# Altium PCB LTE_GPS_433_V1.0.PcbDoc (part 1 of 2)
Units mil, origin at the board's own origin, x right, y up, seen from the top; angles counter-clockwise.
Board outline 3937.01 x 2362.2 mil, 4 copper layers (Top Layer, Mid-Layer 2, POWER, Bottom Layer); 243 components, 180 nets, 856 pads, 468 vias.
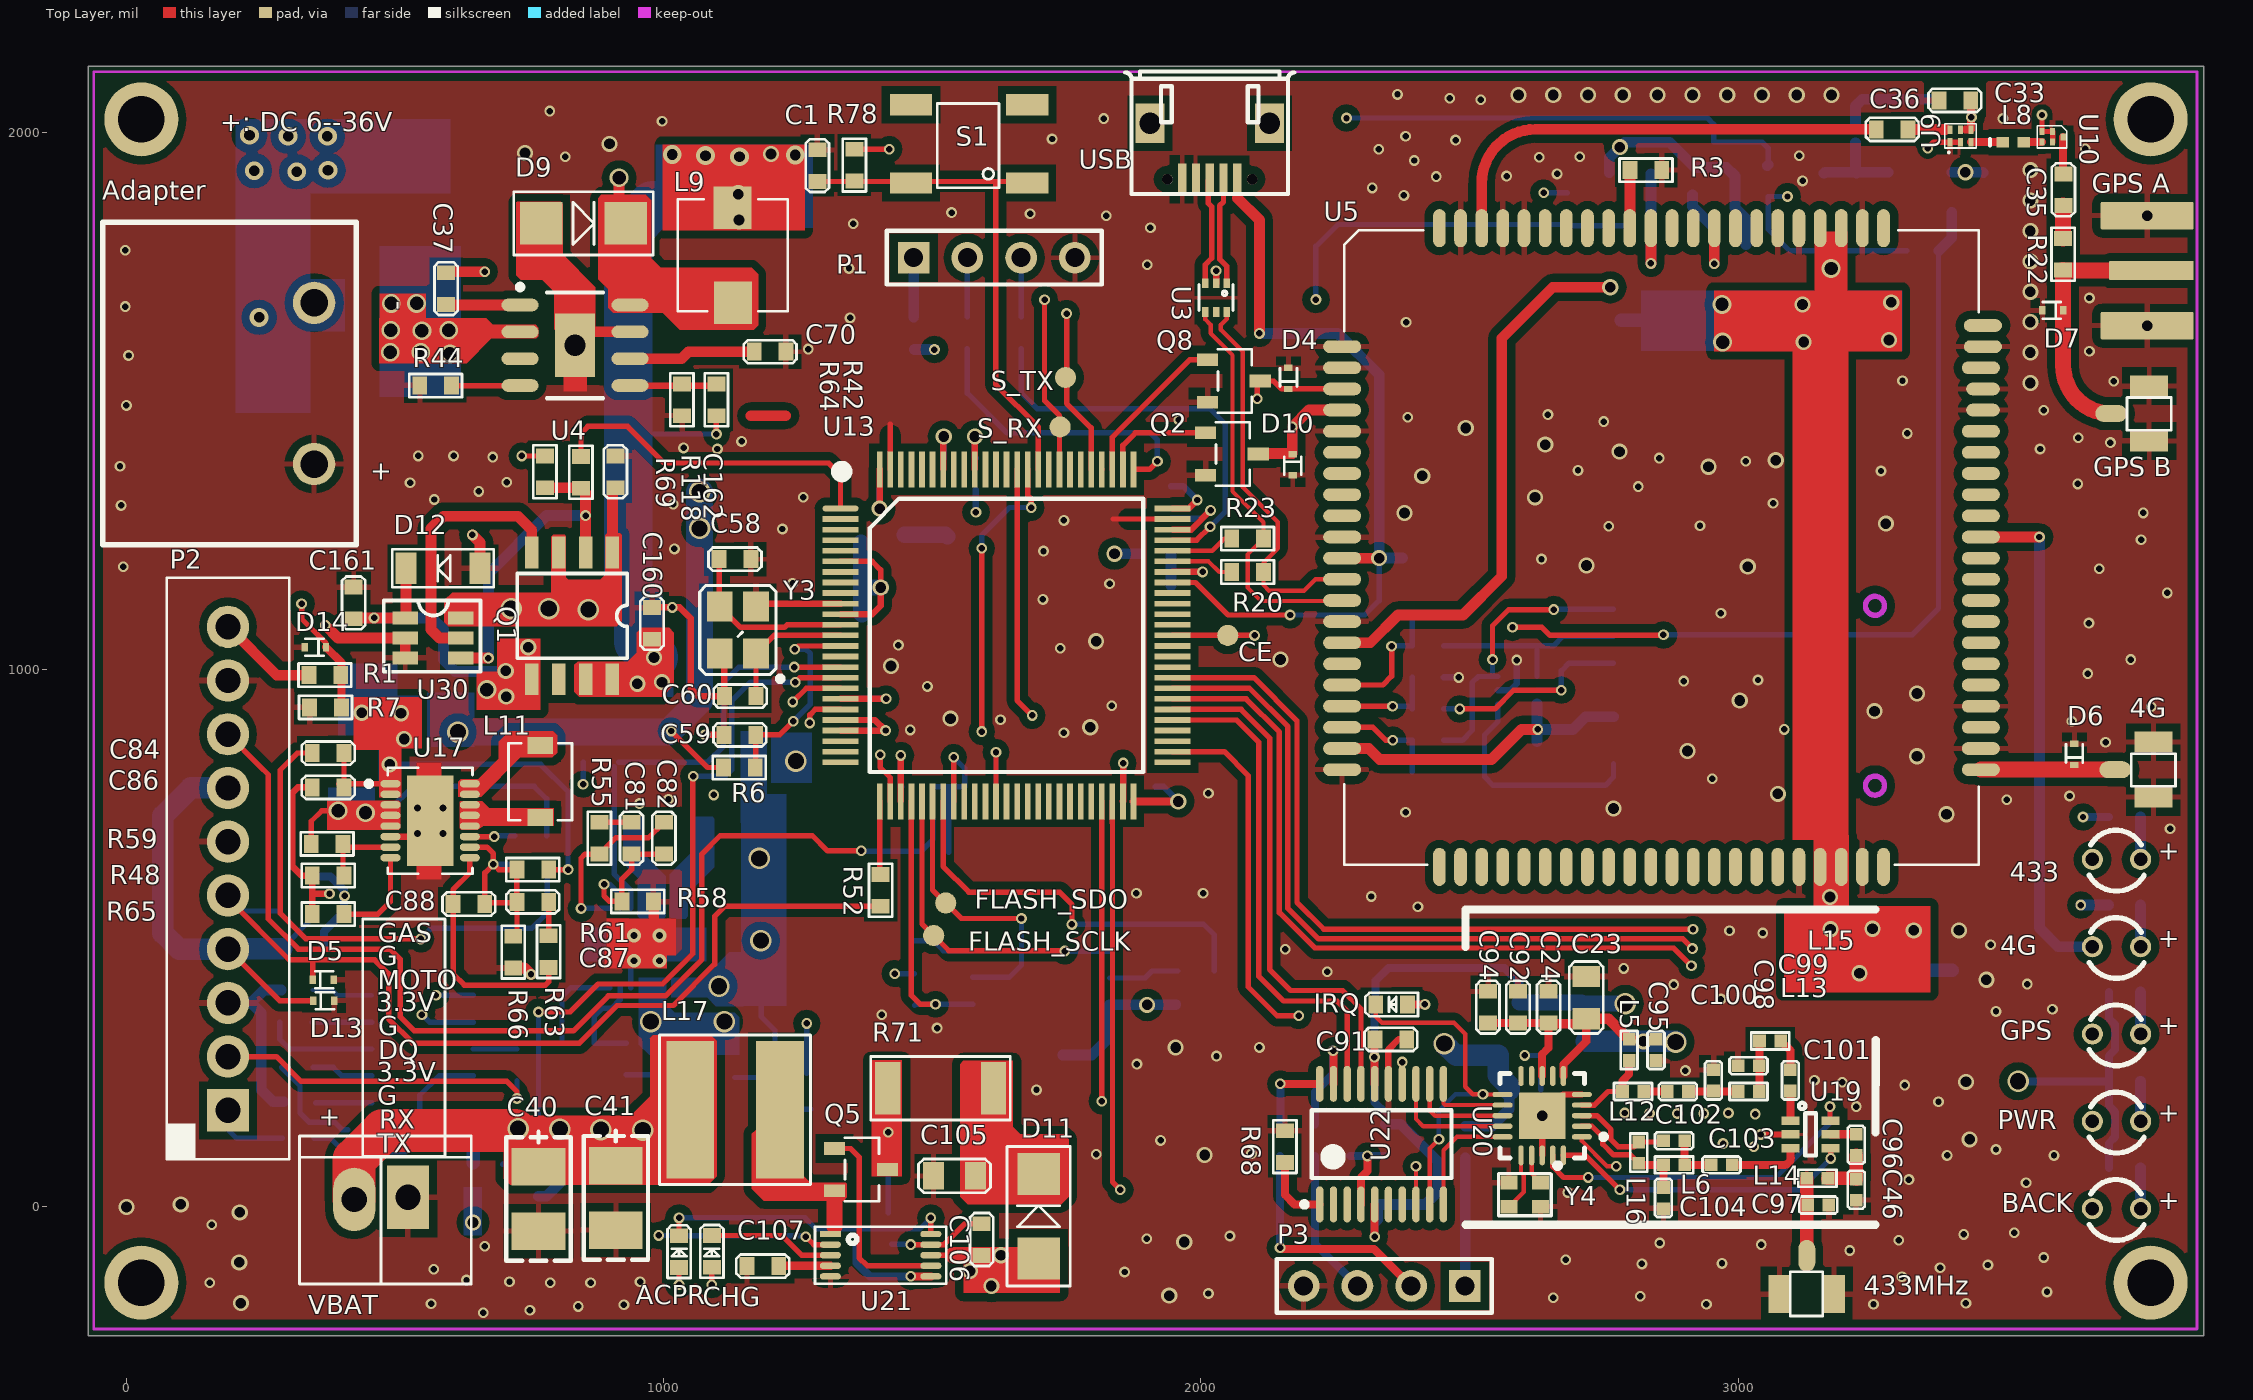
[diagram p0: Top Layer view]
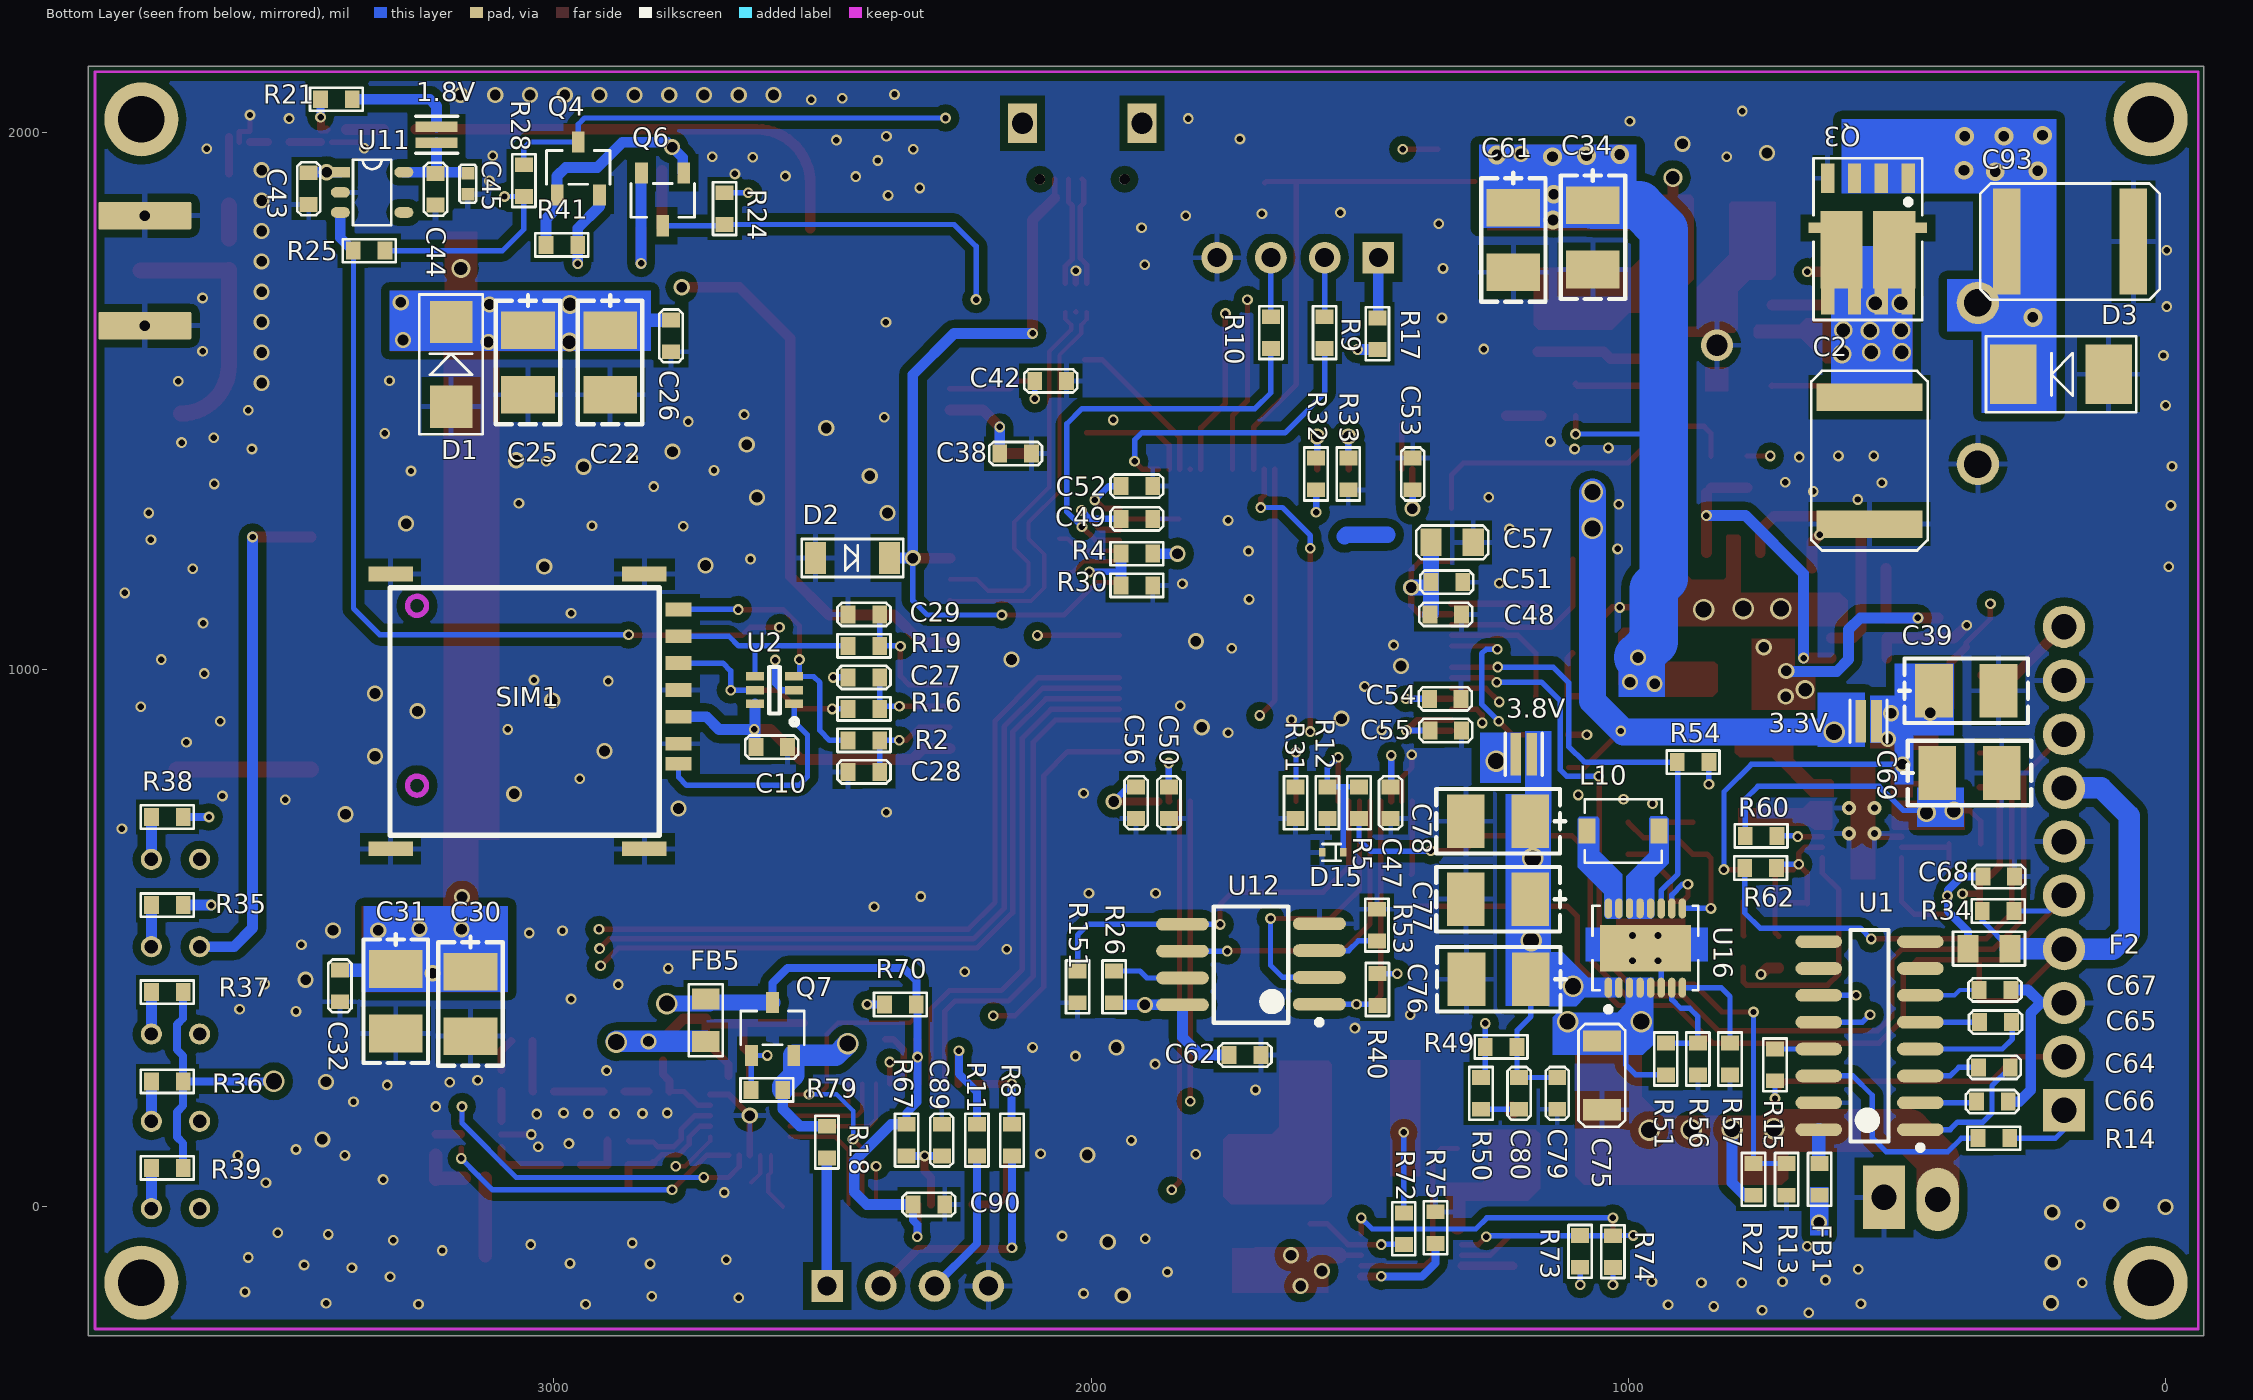
[diagram p1: Bottom Layer view, seen from below]
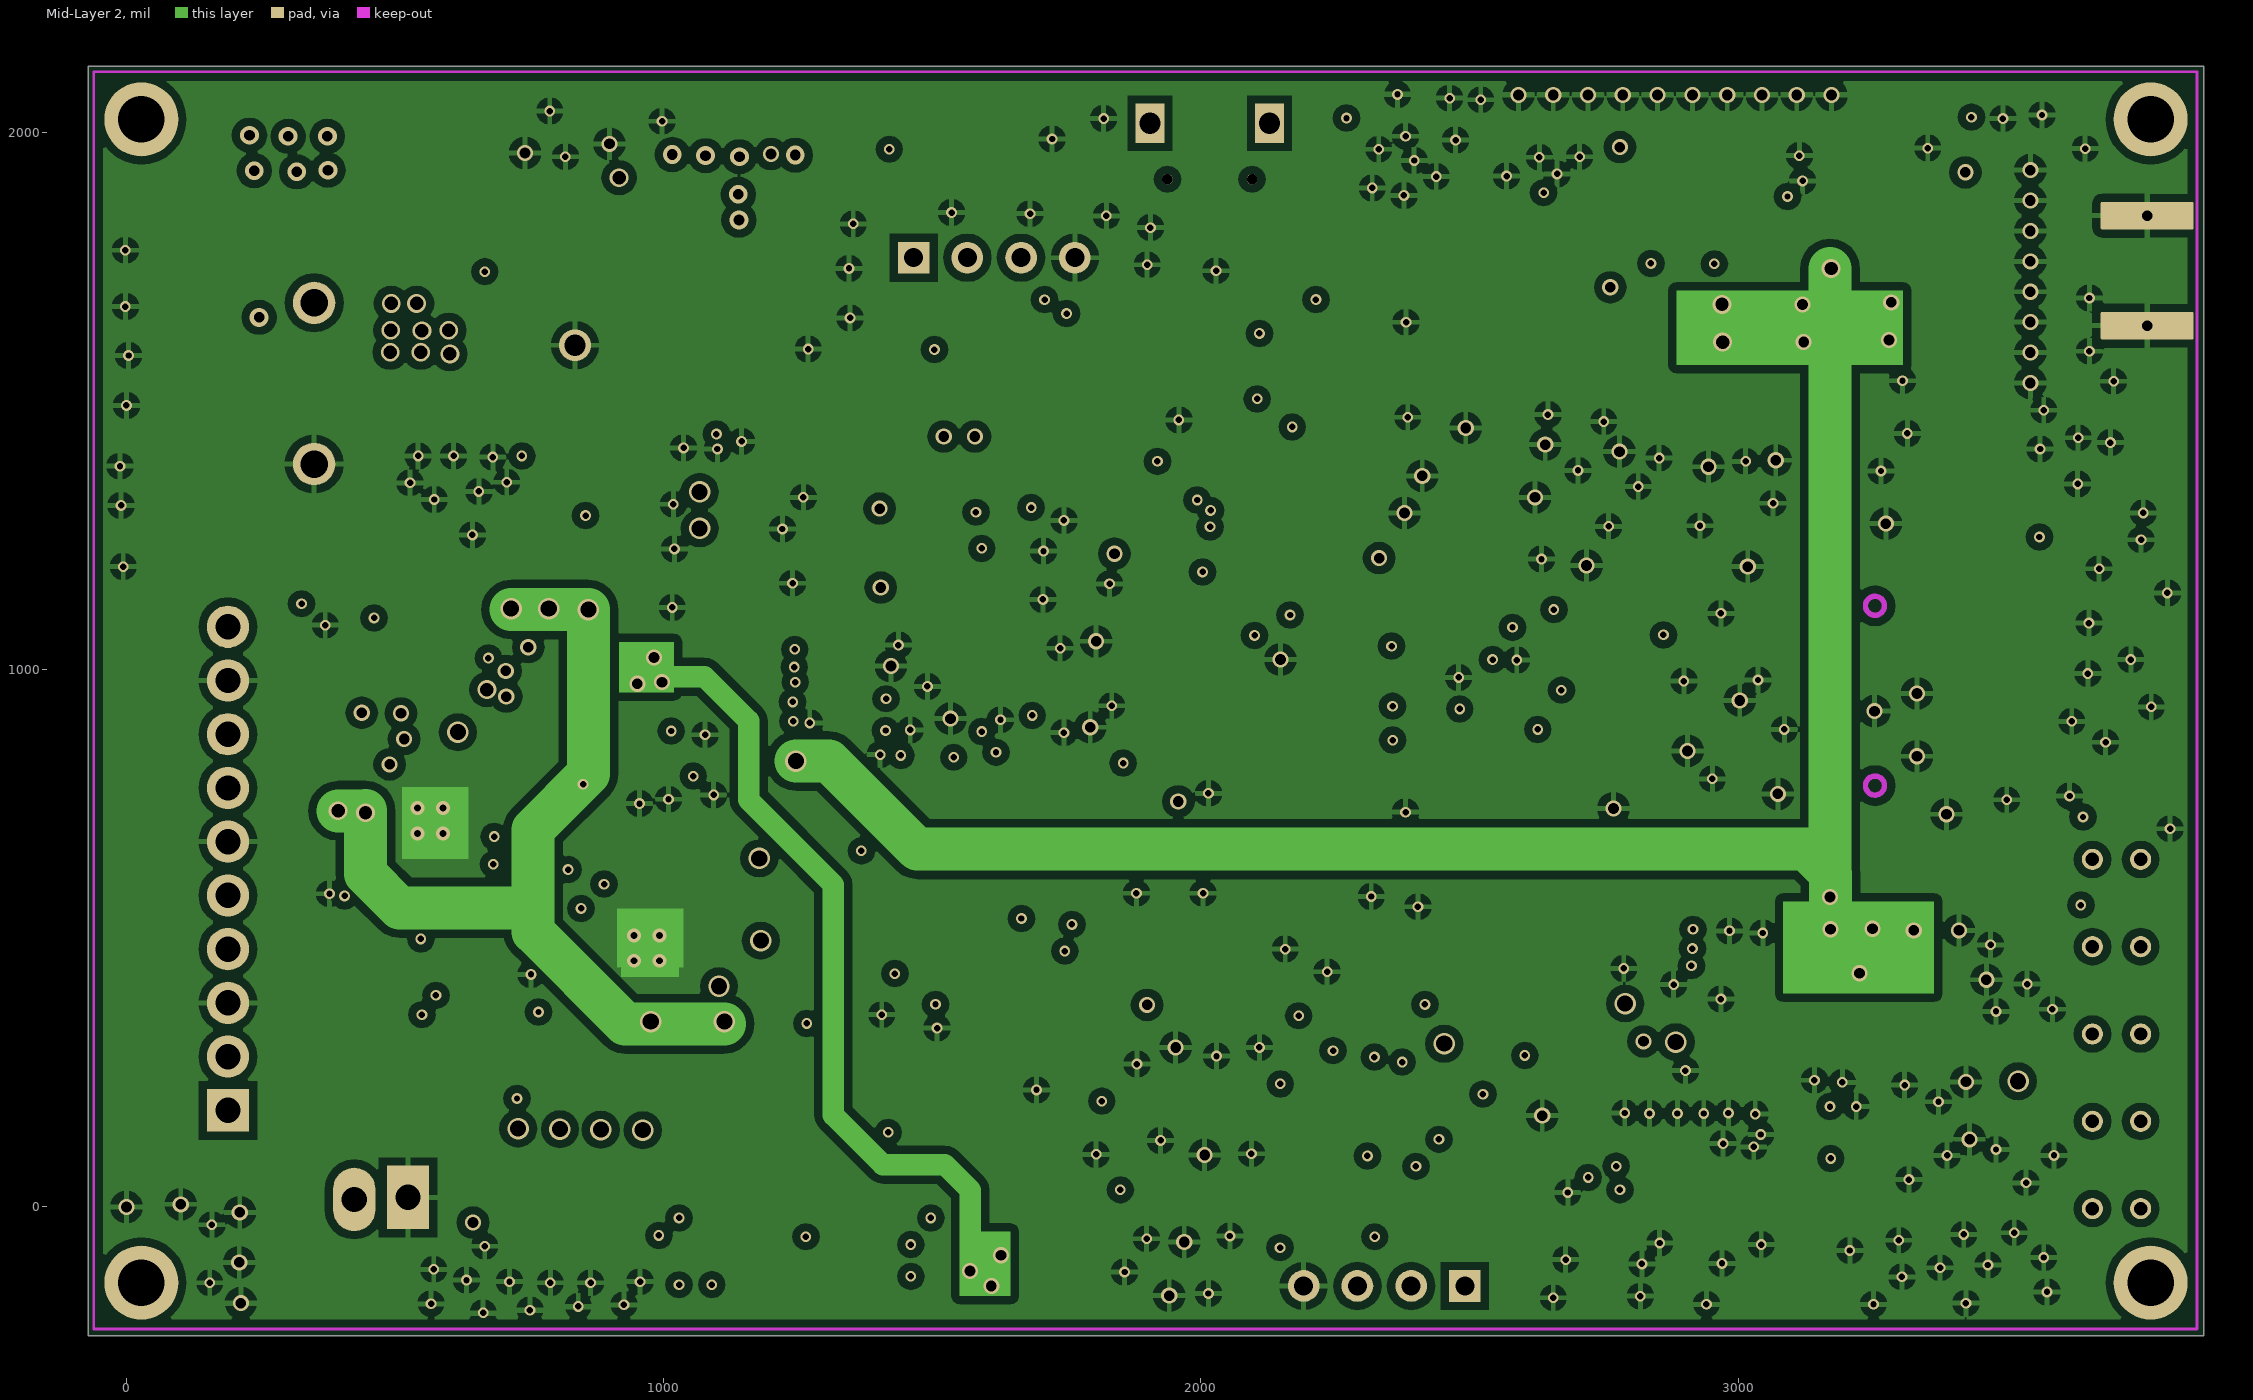
[diagram p2: Mid-Layer 2]
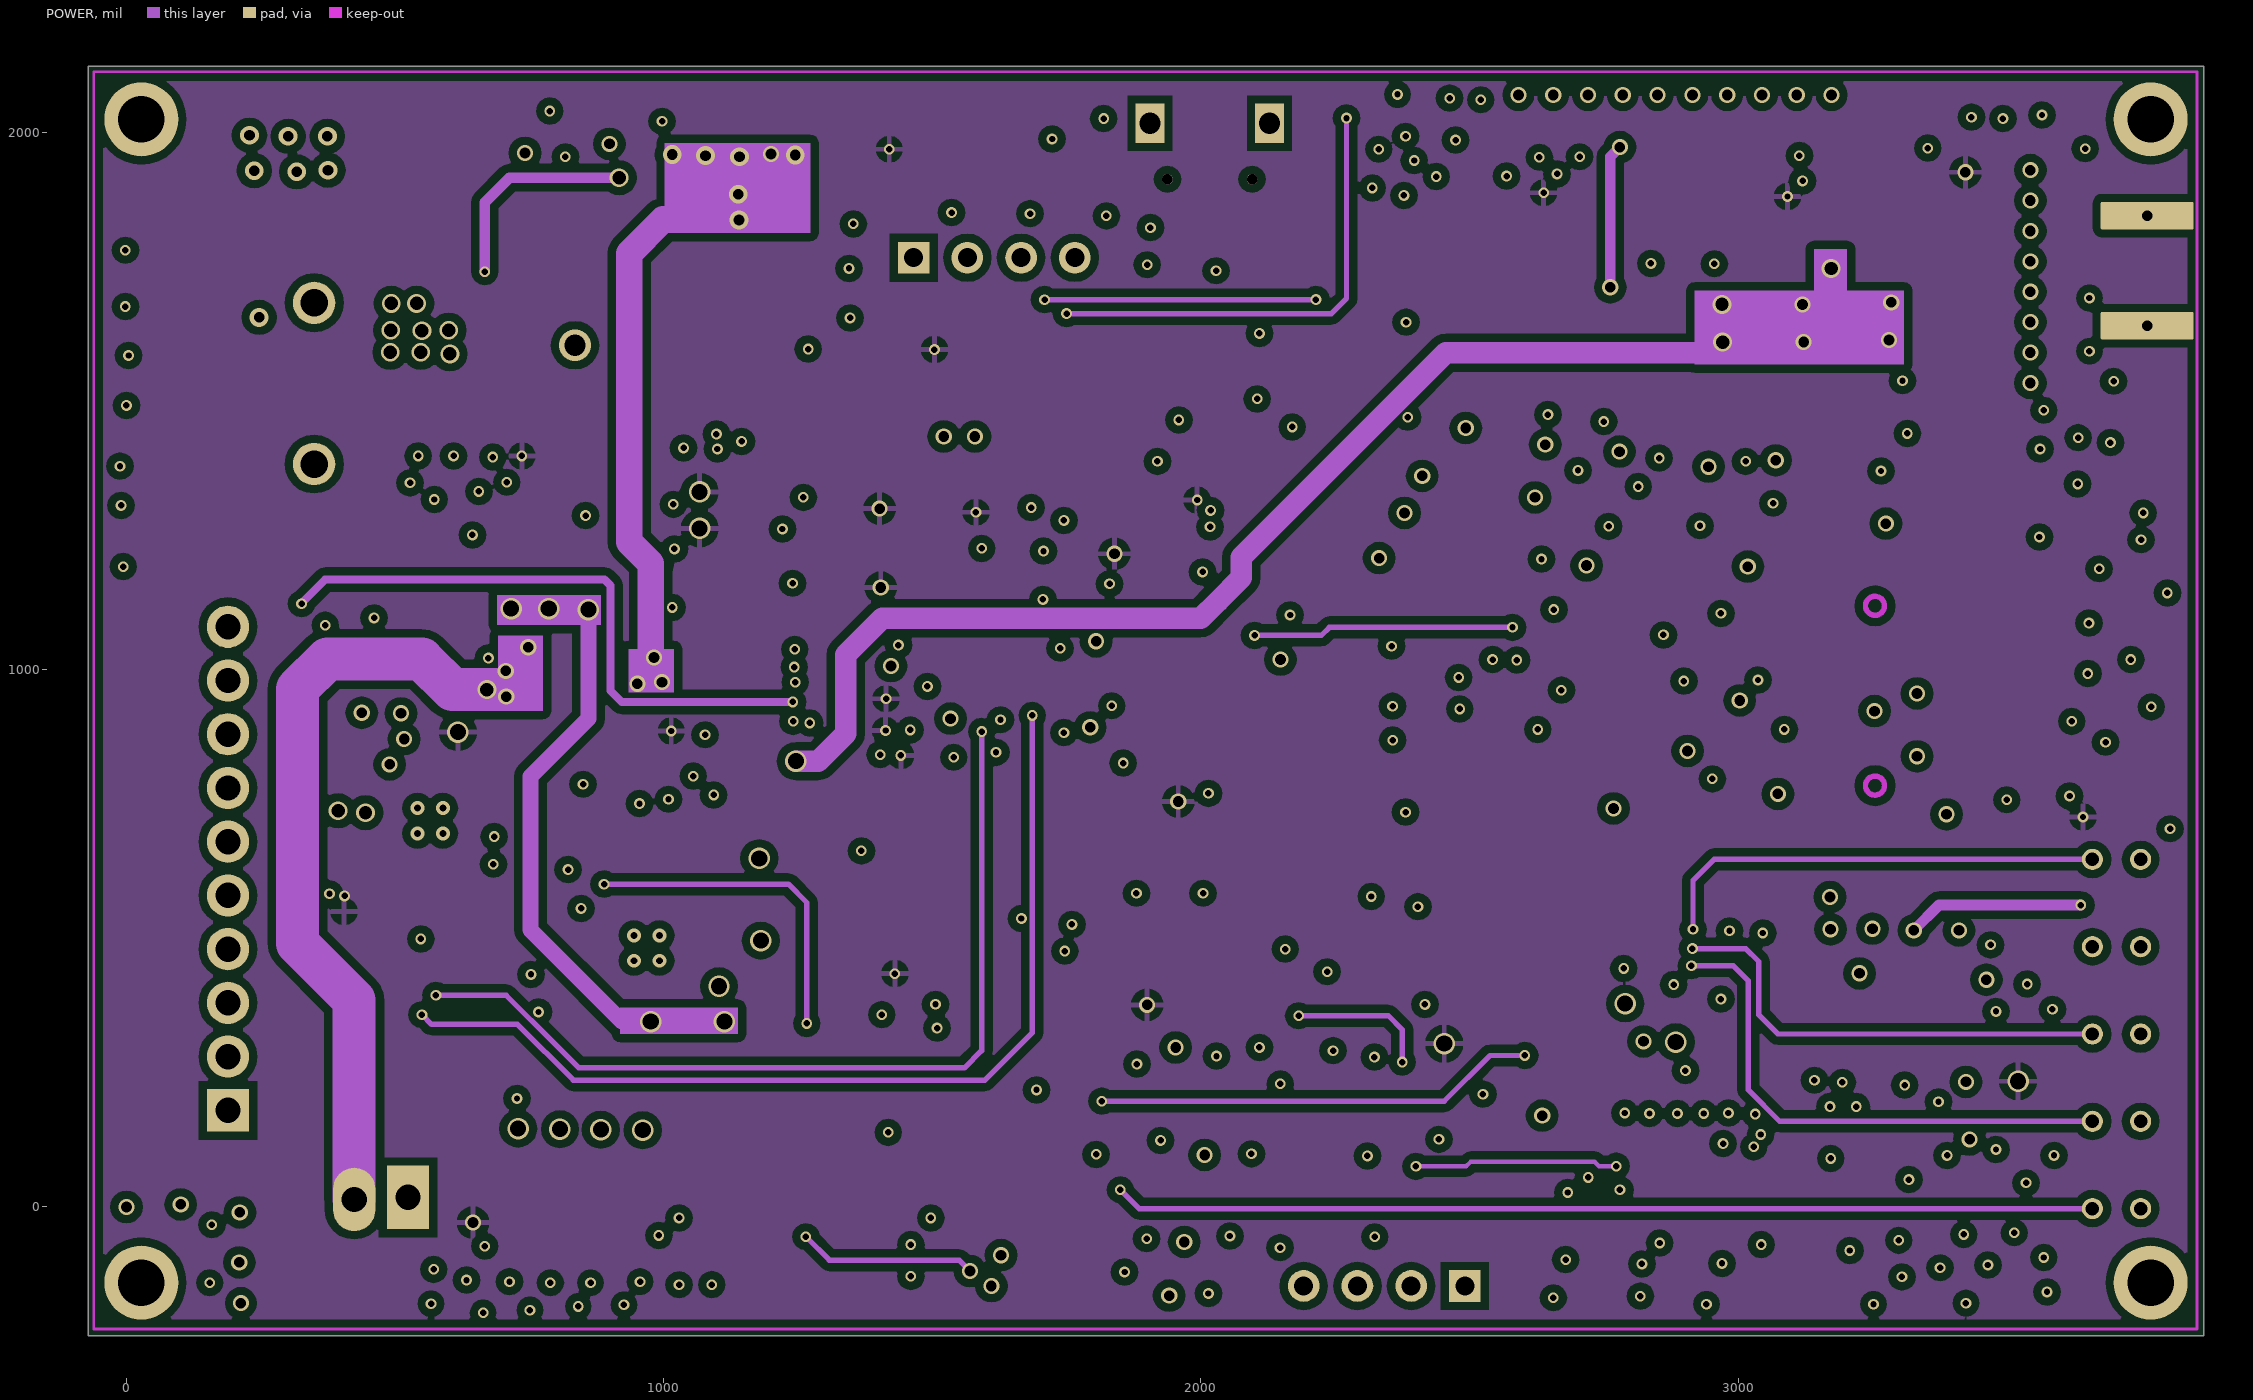
[diagram p3: POWER]

## Layer stack, top to bottom
Top Layer: signal copper 1.4
Dielectric: core 12.6, FR-4, Dk 4.8
Mid-Layer 2: signal copper 1.4
Dielectric: prepreg 12.6, FR-4, Dk 4.8
POWER: signal copper 1.4
Dielectric: core 12.6, FR-4, Dk 4.8
Bottom Layer: signal copper 1.4

## Board outline
-70.68,-239.2 -70.68,2123 3866.32,2123 3866.32,-239.2

## Design rules (kind name [scope] priority, off if disabled: settings)
Clearance Clearance_2 [All] p1: gap=5
Clearance rf [InNetClass('RF')] p2: gap=23.62
Clearance Clearance_1 [InNet('VCC_MCU_3.3V')] p3: gap=15
Clearance [InPolygon And InNet(GND)] p4: gap=15
DiffPairsRouting [All] p1: maxlimit=10 minlimit=10 mostfreqgap=10 maxuncoupledlength=500
MinimumSolderMaskSliver [All] p1: minsoldermaskwidth=2
PlaneClearance [All] p1: clearance=12
PolygonConnect [All] p1: connectstyle=Relief reliefconductorwidth=10 reliefentries=4 polygonreliefangle="90 Angle"
RoutingVias [All] p1: holewidth=28 width=50 viastyle="Through Hole" minholewidth=28 minwidth=50 maxholewidth=28 maxwidth=50
SilkToSilkClearance [All] p1: silktosilkclearance=1
SilkscreenOverComponentPads [All] p1: minsilkscreentomaskgap=0
SolderMaskExpansion [All] p1: expansion=4
Width [All] p1: maxlimit=200 minlimit=8 preferedwidth=10
23 further rules are at their usual default settings.

## Classes and differential pairs
component class RF_433MHz: 433MHz C23 C24 C46 C89 C90 C91 C92 C94 C95 C96 C97 C98 C99 C100 C101 C102 C103 C104 FB5 IRQ L5 L6 L12 L13 L14 L15 L16 Q7 R67 R68 R70 R79 U19 U20 U22 Y4
component class POWER_IN: 3.3V 3.8V ACPR C2 C34 C37 C39 C40 C41 C61 C69 C70 C75 C76 C77 C78 C79 C80 C81 C82 C84 C86 C87 C88 C93 C105 C106 C107 C160 C161 C162 C? CHG D3 D9 D11 D12 D? L9 L10 L11 L17 L? NET7 NET8 Q1 Q3 Q5 R13 R27 R42 R44 R48 R49 R50 R51 R54 R55 R56 R57 R58 R59 R60 R61 R62 R63 R64 R65 R66 R69 R71 R72 R73 R74 R75 R118 R? T7 T8 U4 U16 U17 U21 U30
component class MCU: "4G L" 433 BACK C47 C48 C49 C50 C51 C52 C53 C54 C55 C56 C57 C58 C59 C60 C62 FLASH_SCLK FLASH_SDO GPS PWR R4 R6 R20 R23 R26 R30 R31 R32 R33 R35 R36 R37 R38 R39 R40 R52 R53 R151 U12 U13 Y3
component class LTE: 1.8V 3G_ANT 4G C10 C22 C25 C26 C27 C28 C29 C30 C31 C32 C33 C35 C36 C38 C42 C43 C44 C45 CE D1 D2 D4 D5 D6 D7 "GPS A" "GPS B" L8 Q2 Q4 Q6 Q8 R2 R3 R16 R19 R21 R22 R24 R25 R28 R41 S_RX S_TX SIM1 T1 T3 T4 T5 U2 U5 U7 U8 U9 U10 U11
component class Interface: Adapter C1 C64 C65 C66 C67 C68 D5 D13 D14 D15 F2 FB1 P1 P2 P3 P6 R1 R5 R7 R8 R9 R10 R11 R12 R14 R15 R17 R18 R34 R78 S1 U1 U3 USB VBAT
differential pair USB_D: +USB_D_P -USB_D_N

## Components (designator, comment, footprint, x,y, rotation, side; value= is the part's Value field where it differs from the comment)
1.8V "TEST_P" "TP_High PWR" 3218.32,1981 r90 bottom (schematic designator T5)
3.3V "TEST_P" "TP_High PWR" 538,904 r0 bottom (schematic designator T8)
3.8V "3.8V" "TP_High PWR" 1180,843 r0 bottom (schematic designator T7)
4G "IPX" ECT8180001581 3702,814.1 r270 top (schematic designator U7)
4G "LED0" LED_DIP_3MM 3749.32,484.5 r180 top (schematic designator NET2)
433 "LED0" LED_DIP_3MM 3749.32,647 r180 top
433MHz "IPX" ECT8180001581 3127.84,-90.84 r180 top
ACPR "LED0" 0603LED 1028.65,-112.45 r90 top (schematic designator NET8)
Adapter "Header 2" KF7.62-2P 349.32,1683 r270 top (schematic designator P5)
BACK "LED0" LED_DIP_3MM 3749.32,-3 r180 top (schematic designator NET6)
C1 "0.1uF/50V" 0603C 1286,1909 r90 top
C2 "100uF/50V" 2220C 551,1507.35 r270 bottom
C10 "0.1uF/6.3V" 0603C 2565,856 r0 bottom
C22 "100uF/10V" 1210E 2895.32,1572 r270 bottom
C23 "22uF/10V" 0805C 2717.32,429.27 r270 top
C24 "100nF/10V" 0603C 2647.32,401.71 r270 top
C25 "100uF/10V" 1210E 3048.32,1572 r270 bottom
C26 "1uF/50V" 0603C 2782,1651 r270 bottom
C27 "22pF/6.3V" 0603C 2393.26,985.8 r0 bottom
C28 "22pF/6.3V" 0603C 2393.26,810 r0 bottom
C29 "22pF/6.3V" 0603C 2393.26,1103 r0 bottom
C30 "100uF/10V" 1210E 3155.32,378 r270 bottom
C31 "100uF/10V" 1210E 3294.32,383 r270 bottom
C32 "0.1uF/50V" 0603C 3398.32,441 r270 bottom
C33 "10pF" 0603C 3433,2060 r180 top
C34 "100uF/10V" 1210E 1066,1805 r270 bottom
C35 "33pF" 0603C 3605.32,1864 r90 top
C36 "33pF" 0603C 3316.32,2006 r180 top
C37 "0.1uF/50V" 0603C 595,1739 r270 top
C38 "0.1uF/6.3V" 0603C 2170,1402.37 r180 bottom
C39 "100uF/10V" 1210E 371,961 r180 bottom
C40 "100uF/10V" 1210E 767,15 r270 top
C41 "100uF/10V" 1210E 911,17 r270 top
C42 "0.1uF/6.3V" 0603C 2104.74,1537.63 r180 bottom
C43 "1uF" 0603C 3456.32,1866 r90 bottom
C44 "10uF" 0603C 3220.32,1865 r90 bottom
C45 "1uF" 0402C 3160,1885 r90 bottom
C46 "9.1pF/50V" 0402C 3220,12.63 r90 top
C47 "103" 0603C 1442.32,782 r270 bottom
C48 "105" 0603C 1369.32,1103 r180 bottom
C49 "2.2uF/6.3V" 0603C 1885.32,1281 r0 bottom
C50 "2.2uF/6.3V" 0603C 1855.32,722.94 r90 bottom
C51 "0.1uF/6.3V" 0603C 1308.32,1163 r0 bottom
C52 "0.1uF/6.3V" 0603C 1885.32,1342 r0 bottom
C53 "0.1uF/6.3V" 0603C 1401.32,1394 r270 bottom
C54 "0.1uF/6.3V" 0603C 1311.32,946 r0 bottom
C55 "0.1uF/6.3V" 0603C 1310.32,887 r0 bottom
C56 "0.1uF/6.3V" 0603C 1916.32,722.94 r90 bottom
C57 "10uF/6.3V" 0805C 1367.32,1237 r180 bottom
C58 "10pF/6.3V" 0603C 1162.32,1205.81 r180 top
C59 "1uF/6.3V" 0603C 1112.32,879 r0 top
C60 "10pF/6.3V" 0603C 1113,951 r0 top
C61 "100uF/10V" 1210E 1214,1800 r270 bottom
C62 "0.1uF/6.3V" 0603C 1684,283 r0 bottom
C64 "0.1uF/50V" 0603C 289,260 r0 bottom
C65 "0.1uF/50V" 0603C 287,344 r0 bottom
C66 "0.1uF/50V" 0603C 352,196 r180 bottom
C67 "0.1uF/50V" 0603C 347,404 r180 bottom
C68 "0.1uF/50V" 0603C 281,615 r0 bottom
C69 "100uF/10V" 1210E 365,808 r180 bottom
C70 "22nF/16V" 0603C 1168.66,1592 r0 top
C75 "68uF/16V" 1206C 1049.32,309 r270 bottom
C76 "100uF/10V" 1210E 1241.32,424 r0 bottom
C77 "100uF/10V" 1210E 1242.32,573 r0 bottom
C78 "100uF/10V" 1210E 1242.32,718 r0 bottom
C79 "1uF/16V" 0603C 1132.32,241.06 r270 bottom
C80 "47pF/16V" 0603C 1203.32,241.06 r270 bottom
C81 "680F/16V" 0603C 940.31,716 r270 top
C82 "12pF/16V" 0603C 1000.31,716 r270 top
C84 "33pF/16V" 0603C 405,845 r180 top
C86 "1uF/16V" 0603C 405,781 r180 top
C87 "680pF/16V" 0603C 786,568 r180 top
C88 "10pF/16V" 0603C 608,564 r0 top
C89 "0.1uF" 0603C 2277.98,95 r90 bottom
C90 "0.1uF" 0603C 2272.34,4.8 r0 bottom
C91 "0.1uF" 0603C 2383.32,312 r180 top
C92 "100pF/50V" 0603C 2590.32,401.71 r270 top
C93 "100uF/50V" 2220C 296,1797 r180 bottom
C94 "33pF/50V" 0603C 2534.32,401.71 r270 top
C95 "150pF/50V" 0402C 2847.1,312.01 r270 top
C96 "150pF/50V" 0402C 3220,96 r90 top
C97 "9.1pF/50V" 0402C 3168.84,3.63 r180 top
C98 "9.1pF/50V" 0402C 2954,216 r90 top
C99 "9.1pF/50V" 0402C 3039.1,263.01 r180 top
C100 "8.2pF/50V" 0402C 2868.1,215.01 r0 top
C101 "150pF/50V" 0402C 3097.32,216 r90 top
C102 "2.2pF/50V" 0402C 2861.1,123.36 r0 top
C103 "150pF/50V" 0402C 2949.47,78.36 r0 top
C104 "3.9pF/50V" 0402C 2861,-3 r90 top
C105 "22uF/16V" 0805C 1502,58 r0 top
C106 "0.47uF/16V" 0603C 1592,-31 r270 top
C107 "0.1uF/16V" 0603C 1155,-110 r0 top
C160 "0.1uF" 0603C 978.32,1116 r270 top
C161 "0.1uF/6.3V" 0603C 423,1154 r270 top
C162 "10uF" 0603C 909.97,1398 r270 top
CE "TP" TPD 2050,1064 r0 top (schematic designator T4)
CHG "LED0" 0603LED 1089.57,-112.22 r90 top (schematic designator NET7)
D1 "SMAJ5.0CA" SMA 3191.32,1489.84 r90 bottom
D2 "MMSZ5231BT1G" SOD123 2513,1208 r180 bottom
D3 "TPSMB43A" SMB 106,1550 r0 bottom
D4 "ESD9M5.0S-DTVS105" SOD923#1 2163,1562 r90 top
D5 "ESD9M5.0S-DTVS105" SOD923#1 386,423 r0 top
D6 "ESD9L5" SOD923#2 3626,862 r90 top
D7 "ESD9L5" SOD923#2 3566,1669 r180 top
D9 "SS54" SMa 772,1831 r0 top
D10 "ESD9M5.0S-DTVS105" SOD923#1 2171,1362 r270 top
D11 "MBRA340T3G" SMA 1698,-96 r90 top
D12 "MMSZ5231BT1G" SOD123 658,1189 r180 top
D13 "ESD9B3.3ST5G" SOD923#1 387,384 r0 top
D14 "ESD9B3.3ST5G" SOD923#1 332,1042 r180 top
D15 "ESD9B3.3ST5G" SOD923#1 1570,660 r0 bottom
F2 "1A" 0805R 368,481 r180 bottom
FB1 "" 0603R 644,81 r270 bottom
FB5 "GZ2012D800TF" 0805CZ 2717.32,308.32 r90 bottom
FLASH_SCLK "TP" tpd 1502.66,505.34 r90 top
FLASH_SDO "TP" tpd 1525.07,565.93 r180 top
GPS "LED0" LED_DIP_3MM 3749.32,322 r180 top
"GPS A" "SMA/142-0711-821" "SMA END LAUNCH JACK RECEPTACLE SHORT" 3769.32,1743 r90 top (schematic designator 3G_ANT)
"GPS B" "IPX" ECT8180001581 3694.32,1477 r270 top (schematic designator U8)
IRQ "LED0" 0603LED 2384.43,377 r180 top (schematic designator D10)
L5 "220nH/0402HPH-R22XJL" 0402R 2797.1,312.01 r270 top
L6 "51nH/0402HP-51NXJL" 0402R 2900.47,78.36 r180 top
L8 "5.6nH" INDC1005AL 3512,1982 r0 top
L9 "SRP5030TA-5R6M" SRP5030T 1128.32,1683 r90 top
L10 "IHLP1212BZER2R2M11" IHLP-1212BZ 1077,700 r180 bottom
L11 "IHLP1212BZER2R2M11" IHLP-1212BZ 770.32,859 r270 top
L12 "30nH/0402HP-30NXJL" 0402R 2824.1,215.01 r180 top
L13 "27nH/0402HP-27NXJL" 0402R 3039.1,215.01 r180 top
L14 "15nH/0402HP-15NXJL" 0402R 3127.84,53.63 r0 top
L15 "22nH/0402HP-22NXJL" 0402R 3079.32,309 r180 top
L16 "56nH/0402HP-56NXJL" 0402R 2815,121 r270 top
L17 "CDRH6D28-150NC" CDRH6D23 1049.32,181.05 r90 top
P1 "MHDR1X4" HDR1X4 1465.32,1767 r0 top
P2 "Header 10" 10*2.54MMW 189,180 r90 top
P3 "MHDR1X4" HDR1X4 2491.32,-147 r180 top
PWR "LED0" LED_DIP_3MM 3749.32,159.5 r180 top (schematic designator NET3)
Q1 "FDS9933" FDS9933 904.32,1219 r270 top
Q2 "SI2306" SOT23-3 2008.32,1441 r180 top
Q3 "Si7370DP" "PowerPAK SO-8" 479,1915 r270 bottom
Q4 "SI2306" SOT23-3 2994,1884 r270 bottom
Q5 "ZXM61P03FTA" SOT23-3 1318,109 r180 top
Q6 "SI2306" SOT23-3 2758,1925 r90 bottom
Q7 "ZXM61P03FTA" SOT23-3 2632.32,282.06 r270 bottom
Q8 "SI2306" SOT23-3 2012,1577 r180 top
R1 "20K/1%" 0603R 399,990 r180 top
R2 "10R/5%" 0603R 2452.32,868.6 r180 bottom
R3 "4.7K" 0603R 2858,1930 r180 top
R4 "10K" 0603R 1944.37,1216 r180 bottom
R5 "100K/1%" 0603R 1501.31,782 r270 bottom
R6 "10K" 0603R 1170.32,818 r180 top
R7 "20K/1%" 0603R 341,930 r0 top
R8 "22R" 0603R 2147.32,154.06 r270 bottom
R9 "22R" 0603R 1565.32,1598 r90 bottom
R10 "22R" 0603R 1665.32,1598 r90 bottom
R11 "22R" 0603R 2212.65,154.06 r270 bottom
R12 "30K/1%" 0603R 1560.32,722.94 r90 bottom
R13 "158K/1%" 0603R 705.5,21.94 r90 bottom
R14 "1K" 0603R 290,128 r0 bottom
R15 "1K" 0603R 727,235 r90 bottom
R16 "10R/5%" 0603R 2452.32,927.2 r180 bottom
R17 "22R" 0603R 1467,1596 r90 bottom
R18 "22R" 0603R 2492,150.32 r270 bottom
R19 "10R/5%" 0603R 2452.32,1044.4 r180 bottom
R20 "0" 0603R 2057.32,1182 r0 top
R21 "10R/5%" 0603R 3434.32,2062 r180 bottom
R22 "0" 0603R 3605,1744 r90 top
R23 "0" 0603R 2057.32,1244 r0 top
R24 "10K" 0603R 2682,1888 r270 bottom
R25 "10K" 0603R 3373.32,1780 r180 bottom
R26 "100K" 0603R 1957,380.26 r90 bottom
R27 "158K/1%" 0603R 767,81 r270 bottom
R28 "10K" 0603R 3056,1940 r270 bottom
R30 "10K" 0603R 1944.37,1157 r180 bottom
R31 "10K" 0603R 1619.31,782 r270 bottom
R32 "10K" 0603R 1581.32,1394 r270 bottom
R33 "10K" 0603R 1521.32,1394 r270 bottom
R34 "4.7K" 0603R 282,551 r0 bottom
R35 "1K" 0603R 3690,562 r0 bottom
R36 "1K" 0603R 3690,234 r0 bottom
R37 "1K" 0603R 3690,400 r0 bottom
R38 "1K" 0603R 3690,726 r0 bottom
R39 "1K" 0603R 3690,73 r0 bottom
R40 "100K" 0603R 1467,375.32 r90 bottom
R41 "10K" 0603R 2955.69,1791 r0 bottom
R42 "100K/1%" 0603R 1098.2,1532 r270 top
R44 "84.5K" 0603R 546,1529 r0 top
R48 "10K/NC" 0603R 405,617 r180 top
R49 "665K/1%" 0603R 1266.32,298 r180 bottom
R50 "6.49K/1%" 0603R 1274.32,182 r90 bottom
R51 "1M" 0603R 930.31,245.94 r90 bottom
R52 "100" 0603R 1404,619 r270 top
R53 "100K" 0603R 1468,554.32 r270 bottom
R54 "10K" 0603R 850,828 r0 bottom
R55 "49.9K/1%" 0603R 880.32,716 r270 top
R56 "10K/NC" 0603R 870.57,305 r270 bottom
R57 "90.9K/1%" 0603R 810.82,305 r270 bottom
R58 "124K/1%" 0603R 981.32,569 r180 top
R59 "1M" 0603R 344,676 r0 top
R60 "1M" 0603R 782.32,691 r180 bottom
R61 "715K/1%" 0603R 726.94,628 r0 top
R62 "10K/1%" 0603R 783.32,631 r180 bottom
R63 "10K/1%" 0603R 786,505 r270 top
R64 "17.8K/1%" 0603R 1033.97,1532 r270 top
R65 "90.9K/1%" 0603R 405,545 r180 top
R66 "158K/1%" 0603R 720,445 r90 top
R67 "10K" 0603R 2343.31,154.06 r270 bottom
R68 "10K" 0603R 2156.32,83 r90 top
R69 "1M" 0603R 778.97,1338.94 r90 top
R70 "1K" 0603R 2325.37,377 r0 bottom
R71 "0.082/1/4W" 2010R 1417,221 r0 top
R72 "4.7/1%" 0603R 1418,-11 r270 bottom
R73 "1K" 0603R 1089.57,-53.16 r270 bottom
R74 "1K" 0603R 1028.65,-53.39 r270 bottom
R75 "19.6K" 0603R 1359,-9 r270 bottom
R78 "10K" 0603R 1355,1969 r270 top
R79 "10K" 0603R 2633,218 r180 bottom
R118 "0" 0603R 846,1338 r90 top
R151 "100K" 0603R 2025,439.32 r270 bottom
S1 "SW-PB" KEY_SMT_4*4 1460.32,1906 r90 top
S_RX "TP" TPD 1738,1452 r0 top (schematic designator T1)
S_TX "TP" TPD 1748,1544 r0 top (schematic designator T3)
SIM1 "nano sim" "Nano SIM" 2768,825 r270 bottom
U1 "MAX3232ESE+" SOIC127P600X265-16N 551,319 r0 bottom
U2 "SMF05C" SC70-6L 2589.32,962 r0 bottom
U3 "NUF2042XV6T1" SOT563-6 2028.32,1693 r180 top
U4 "LMR14050SDDA" SOP127P600X168_HS-8N 835,1604 r0 top
U5 "SIM7600CE" SIM7600CE 2483.32,633 r0 top
U9 "BGU7005" BGU7005 3394.32,1982 r0 top
U10 "SAFEA1G58KA0F00R15" SAFEA1G58KA0F00R15 3605,1992 r180 top
U11 "XC6204-30" SOT23-5(DBV) 3397.42,1926 r180 bottom
U12 "M25P32-VMW6" SOIC127P790X216-8N 1698,451.32 r0 bottom
U13 "STM32F427VIT6" LQFQ100-stm32f103v 1638.32,1064 r0 top
U16 "LTC3113IDHD#PBF" QFN50P400X500X80-16N 968.32,482 r90 bottom
U17 "LTC3113IDHD#PBF" QFN50P400X500X80-16N 565.32,719 r0 top
U19 "UPG2214TB" SC70-6 3135,135 r0 top
U20 "Si4463-C2A-GM" QFN50P400X400X80-20N 2635.32,170 r180 top
U21 "LTC1732-4.2" MSOP-10 1310.32,-50.35 r0 top
U22 "STM32F042F6P6" SOP65P640X265-20N 2336.32,117 r90 top
U30 "LTC4412ES6" TSOT-23 519.32,1097 r0 top
USB "Header 5" USB-MICRO-5P-2 1965.32,1913 r0 top
VBAT "Header 2" 2X2.54MM 524,18 r180 top (schematic designator P6)
Y3 "25MHz" OSCILLATOR-3.2X2.5 1138.32,1073.81 r90 top
Y4 "TZ1430A" OSCILLATOR-2.5X2.0 2603,23 r180 top

## Footprints (in the part's own frame and the unit in brackets; to place one, negate y for a bottom-side part, rotate by r counter-clockwise, add the part's x,y. Pads: shape width x height; smd on the part's side, far side on the other; paste and mask are expansions set on the pad)
2X2.54MM [mm]
  rect 2x3 hole 1.2: 1(0,0)
  oval 2x3 hole 1.2: 2(2.54,0.1)
  silkscreen extent -3,-2.9 5.13,4.1
10*2.54MMW [mm]
  rect 2x2 hole 1.2: 1(0,0)
  round 2 hole 1.2: 2(2.54,0) 3(5.08,0) 4(7.62,0) 5(10.16,0) 6(12.7,0) 7(15.24,0) 8(17.78,0) 9(20.32,0) 10(22.86,0)
  silkscreen extent -2.32,-2.9 25.18,2.91
0402C [mm]
  rect 0.6x0.6 smd: 1(0,0) 2(1,0)
  silkscreen extent -0.4,-0.4 1.4,0.4
0402R [mm]
  rect 0.6x0.6 smd: 1(0,0) 2(1,0)
  silkscreen extent -0.4,-0.4 1.4,0.4
0603C [mm]
  rect 0.7x0.85 smd: 1(0,0) 2(1.5,0)
  silkscreen extent -0.5,-0.55 2,0.55
0603LED [mm]
  rect 0.7x0.85 smd: 1(0,0) 2(1.5,0)
  silkscreen extent -0.5,-0.55 2,0.55
0603R [mm]
  rect 0.7x0.85 smd: 1(0,0) 2(1.5,0)
  silkscreen extent -0.5,-0.55 2,0.55
0805C [mm]
  rect 1x1.3 smd: 1(0,0) 2(2,0)
  silkscreen extent -0.7,-0.8 2.7,0.8
0805CZ [mm]
  rect 1x1.3 smd: 1(0,0) 2(2,0)
  silkscreen extent -0.7,-0.8 2.7,0.8
0805R [mm]
  rect 1x1.3 smd: 1(0,0) 2(2,0)
  silkscreen extent -0.7,-0.8 2.7,0.8
1206C [mm]
  rect 1x1.8 smd: 1(0,0) 2(3.25,0)
  silkscreen extent -0.8,-1.1 4.05,1.1
1210E [mil]
  rect 70x100 smd: 1(-60,0) 2(60,0)
  silkscreen extent -125,-60 115,60
2010R [mm]
  rect 1.2x2.5 smd: 1(0,0) 2(5,0)
  silkscreen extent -0.8,-1.5 5.8,1.5
2220C [mm] "C"
  rect 1.3x5 smd: 1(0,0) 2(6,0)
  silkscreen extent -1.25,-2.75 7.25,2.75
BGU7005 [mm]
  rect 0.25x0.4 smd: 1(0,0) 2(0.5,0) 3(1,0) 4(1,0.6) 5(0.5,0.6) 6(0,0.6)
  silkscreen extent -0.25,-0.53 1.25,0.87
CDRH6D23 [mm]
  rect 6.5x2.26 smd: 1(0,0) 2(0,-4.25)
  silkscreen extent -3.53,-5.69 3.53,1.45
ECT8180001581 [mm]
  oval 0.8x1.5 smd: 1(0,0)
  rect 1x1.8 smd: 2(-1.3,1.8) 3(1.3,1.8)
  silkscreen extent -0.76,0.75 0.79,2.85
FDS9933 [mm]
  rect 1.5x0.635 smd: 1(0.015,0.008) 2(0.015,-1.262) 3(0.015,-2.532) 4(0.015,-3.802) 5(6.015,-3.802) 6(6.015,-2.532) 7(6.015,-1.262) 8(6.015,0.008)
  silkscreen extent 1.02,-4.49 5.02,0.71
HDR1X4 [mm] "Connector; Header; 4 Position"
  rect 1.5x1.5 hole 0.9: 1(0,0)
  round 1.5 hole 0.9: 2(2.54,0) 3(5.08,0) 4(7.62,0)
  silkscreen extent -1.27,-1.27 8.89,1.27
IHLP-1212BZ [mm]
  rect 0.8x1.2 smd: 1(0,0) 2(3.4,0)
  silkscreen extent -0.1,-1.5 3.53,1.5
INDC1005AL [mm] "Chip Inductor, Body 1.0x0.5mm, IPC High Density"
  rect 0.6x0.5 smd: 1(-0.5,0) 2(0.5,0)
  silkscreen extent -1.1,-0.15 -1.1,0.15, body extent -0.55,-0.3 0.55,0.3, height 0.55
KEY_SMT_4*4 [mm]
  rect 1x2 smd: 1(0,0) 1(0,-5.5) 2(3.7,-5.5) 2(3.7,0)
  silkscreen extent -0.23,-4.17 3.76,-1.24
KF7.62-2P [mm]
  round 2 hole 1.3: 1(0,0) 2(7.62,0)
  silkscreen extent -3.81,-10 11.43,2
LED_DIP_3MM [mm]
  round 1 hole 0.635: 1(0,0) 2(2.28,0)
  silkscreen extent -0.16,-1.37 2.44,1.5
LQFQ100-stm32f103v [mm]
  oval 1.7x0.27 smd: 1(-7.85,6)
  rect 1.7x0.27 smd: 2(-7.85,5.5) 3(-7.85,5) 4(-7.85,4.5) 5(-7.85,4) 6(-7.85,3.5) 7(-7.85,3) 8(-7.85,2.5) 9(-7.85,2) 10(-7.85,1.5) 11(-7.85,1) 12(-7.85,0.5) 13(-7.85,0) 14(-7.85,-0.5) 15(-7.85,-1) 16(-7.85,-1.5) 17(-7.85,-2) 18(-7.85,-2.5) 19(-7.85,-3) 20(-7.85,-3.5) 21(-7.85,-4) 22(-7.85,-4.5) 23(-7.85,-5) 24(-7.85,-5.5) 25(-7.85,-6) 51(7.85,-6) 52(7.85,-5.5) 53(7.85,-5) 54(7.85,-4.5) 55(7.85,-4) 56(7.85,-3.5) 57(7.85,-3) 58(7.85,-2.5) 59(7.85,-2) 60(7.85,-1.5) 61(7.85,-1) 62(7.85,-0.5) 63(7.85,0) 64(7.85,0.5) 65(7.85,1) 66(7.85,1.5) 67(7.85,2) 68(7.85,2.5) 69(7.85,3) 70(7.85,3.5) 71(7.85,4) 72(7.85,4.5) 73(7.85,5) 74(7.85,5.5) 75(7.85,6)
  rect 0.27x1.7 smd: 26(-6,-7.85) 27(-5.5,-7.85) 28(-5,-7.85) 29(-4.5,-7.85) 30(-4,-7.85) 31(-3.5,-7.85) 32(-3,-7.85) 33(-2.5,-7.85) 34(-2,-7.85) 35(-1.5,-7.85) 36(-1,-7.85) 37(-0.5,-7.85) 38(0,-7.85) 39(0.5,-7.85) 40(1,-7.85) 41(1.5,-7.85) 42(2,-7.85) 43(2.5,-7.85) 44(3,-7.85) 45(3.5,-7.85) 46(4,-7.85) 47(4.5,-7.85) 48(5,-7.85) 49(5.5,-7.85) 50(6,-7.85) 76(6,7.85) 77(5.5,7.85) 78(5,7.85) 79(4.5,7.85) 80(4,7.85) 81(3.5,7.85) 82(3,7.85) 83(2.5,7.85) 84(2,7.85) 85(1.5,7.85) 86(1,7.85) 87(0.5,7.85) 88(0,7.85) 89(-0.5,7.85) 90(-1,7.85) 91(-1.5,7.85) 92(-2,7.85) 93(-2.5,7.85) 94(-3,7.85) 95(-3.5,7.85) 96(-4,7.85) 97(-4.5,7.85) 98(-5,7.85) 99(-5.5,7.85) 100(-6,7.85)
  silkscreen extent -8.05,-6.46 6.46,8
MSOP-10 [mm]
  rect 1x0.3 smd: 1(0,0)
  oval 1x0.3 smd: 2(0,-0.5) 3(0,-1) 4(0,-1.5) 5(0,-2) 6(4.75,-2) 7(4.75,-1.5) 8(4.75,-1) 9(4.75,-0.5) 10(4.75,0)
  silkscreen extent -0.72,-2.35 5.47,0.35
"Nano SIM" [mm]
  rect 0.7x2.1 smd: 0(-8.97,-13.615) 0(-8.97,-1.615) 0(4.02,-13.615) 0(4.02,-1.615)
  rect 0.65x1.23 smd: 1(-2.22,0) 2(-4.76,0) 3(-7.3,0) 5(-0.95,0) 6(-3.49,0) 7(-6.03,0) 8(0,0)
  Keep-Out Layer circle w0.254: c1.03,-12.365 r0.45
  Keep-Out Layer circle w0.254: c-7.47,-12.365 r0.45
  silkscreen extent -8.33,-13.64 3.38,-0.91
OSCILLATOR-2.5X2.0 [mm] "OSCILLATOR-3.2X2.5"
  rect 0.8x0.65 smd: 1(-0.75,-0.575) 2(0.75,-0.575) 3(0.75,0.575) 4(-0.75,0.575)
  silkscreen extent -1.65,-1.47 1.25,1
OSCILLATOR-3.2X2.5 [mil] "OSCILLATOR-3.2X2.5"
  rect 56x48 smd: 1(-43.31,-33.46) 2(44,-33.46) 3(44,34) 4(-43.31,34)
  silkscreen extent -95,-83 83,71
"PowerPAK SO-8" [mm]
  rect 1.397x0.635 smd: 1(0,0) 2(0,-1.27) 3(0,-2.54) 4(0,-3.81) 5(5.75,-3.81) 6(5.75,-2.54) 7(5.75,-1.27) 8(5.75,0)
  rect 0.5x1.6 smd: 5(2.35,-3.905) 8(2.35,0.095)
  rect 3.66x2 smd: 5(3.375,-3.155) 8(3.375,-0.655)
  silkscreen extent -0.95,-4.48 6.7,0.67
QFN50P400X400X80-20N [mm] "QFN, 20-Leads, Body 4.0x4.0mm (max), Pitch 0.50mm, IPC Medium Density"
  oval 0.95x0.25 smd: 1(-1.875,1) 2(-1.875,0.5) 3(-1.875,0) 4(-1.875,-0.5) 5(-1.875,-1) 11(1.875,-1) 12(1.875,-0.5) 13(1.875,0) 14(1.875,0.5) 15(1.875,1)
  oval 0.25x0.95 smd: 6(-1,-1.875) 7(-0.5,-1.875) 8(0,-1.875) 9(0.5,-1.875) 10(1,-1.875) 16(1,1.875) 17(0.5,1.875) 18(0,1.875) 19(-0.5,1.875) 20(-1,1.875)
  rect 2.2x2.2 smd: 21(0,0)
  silkscreen extent -3.03,-2 2,2
QFN50P400X500X80-16N [mm] "QFN, 16-Leads, Body 5.0x4.0mm (max), Pitch 0.50mm, IPC Medium Density"
  oval 0.95x0.35 smd: 1(-1.875,1.75) 2(-1.875,1.25) 3(-1.875,0.75) 4(-1.875,0.25) 5(-1.875,-0.25) 6(-1.875,-0.75) 7(-1.875,-1.25) 8(-1.875,-1.75) 9(1.875,-1.75) 10(1.875,-1.25) 11(1.875,-0.75) 12(1.875,-0.25) 13(1.875,0.25) 14(1.875,0.75) 15(1.875,1.25) 16(1.875,1.75)
  rect 2.2x4.3 smd: 17(0,0)
  silkscreen extent -3.02,-2.5 2,2.5, body extent -2,-2.5 2,2.5, height 0.8
SAFEA1G58KA0F00R15 [mm]
  rect 0.25x0.33 smd: 1(0,0) 2(0.5,-0.25) 3(1,-0.25) 4(1,0.25) 5(0.5,0.25)
  silkscreen extent -0.18,-0.53 1.22,0.53
SC70-6 [mm] "SC70 6-Leads, Body 2.0x1.25mm, Pitch 0.65mm"
  rect 0.85x0.4 smd mask+0.05: 1(-0.95,0.65) 2(-0.95,0) 3(-0.95,-0.65) 4(0.95,-0.65) 5(0.95,0) 6(0.95,0.65)
  silkscreen extent -0.55,-1 0.25,1.5, body extent -0.63,-1 0.63,1, height 1.45
SC70-6L [mm]
  rect 0.85x0.4 smd: 1(-0.925,0.65) 2(-0.925,0) 3(-0.925,-0.65) 4(0.925,-0.65) 5(0.925,0) 6(0.925,0.65)
  silkscreen extent -1.09,-1.1 0.25,1.65
SIM7600CE [mm]
  oval 1.8x0.6 smd: 1(-5.6,24.6) 2(-5.6,23.6) 3(-5.6,22.6) 4(-5.6,21.6) 5(-5.6,20.6) 6(-5.6,19.6) 7(-5.6,18.6) 8(-5.6,17.6) 9(-5.6,16.6) 10(-5.6,15.6) 11(-5.6,14.6) 12(-5.6,13.6) 13(-5.6,12.6) 14(-5.6,11.6) 15(-5.6,10.6) 16(-5.6,9.6) 17(-5.6,8.6) 18(-5.6,7.6) 19(-5.6,6.6) 20(-5.6,5.6) 41(24.6,5.6) 42(24.6,6.6) 43(24.6,7.6) 44(24.6,8.6) 45(24.6,9.6) 46(24.6,10.6) 47(24.6,11.6) 48(24.6,12.6) 49(24.6,13.6) 50(24.6,14.6) 51(24.6,15.6) 52(24.6,16.6) 53(24.6,17.6) 54(24.6,18.6) 55(24.6,19.6) 56(24.6,20.6) 59(24.6,23.6) 60(24.7,24.6) 81(-5.6,4.6) 82(24.6,4.6) 85(24.7,25.6)
  oval 0.6x1.8 smd: 21(0,0) 22(1,0) 23(2,0) 24(3,0) 25(4,0) 26(5,0) 27(6,0) 28(7,0) 29(8,0) 30(9,0) 31(10,0) 32(11,0) 33(12,0) 34(13,0) 35(14,0) 36(15,0) 37(16,0) 38(17,0) 39(18,0) 40(19,0) 61(19,30.2) 62(18,30.2) 63(17,30.2) 64(16,30.2) 65(15,30.2) 66(14,30.2) 67(13,30.2) 68(12,30.2) 69(11,30.2) 70(10,30.2) 71(9,30.2) 72(8,30.2) 73(7,30.2) 74(6,30.2) 75(5,30.2) 76(4,30.2) 77(3,30.2) 78(2,30.2) 79(1,30.2) 80(0,30.2) 83(20,0) 84(-1,0) 86(-1,30.2) 87(20,30.2)
  oval 1.6x0.6 smd: 57(24.7,21.6) 58(24.7,22.6)
  silkscreen extent -5.5,0.1 24.5,30.1
SMA [mm]
  rect 2x2 smd: 1(0,0) 2(4,0)
  silkscreen extent -1.3,-1.5 5.3,1.5
SMa [mm]
  rect 2x2 smd: 1(0,0) 2(4,0)
  silkscreen extent -1.3,-1.5 5.3,1.5
"SMA END LAUNCH JACK RECEPTACLE SHORT" [mm] "SMA Connector - End Launch Jack Receptacle - Short"
  rrect10% 0.9x4 smd paste+0 mask+0.05: 1(0,0)
  rrect10% 1.3x4.4 hole 0.5 mask+0.05: 2(-2.6,0.2) 2(2.6,0.2)
  body extent -0.5,-2.05 0.5,2.05, height 8
SMB [mm]
  rect 2.2x2.8 smd: 1(0,0) 2(4.5,0)
  silkscreen extent -1.3,-1.8 5.8,1.8
SOD123 [mm]
  rect 1x1.5 smd: A(0,0) K(3.5,0)
  silkscreen extent -0.65,-0.9 4.15,0.9
SOD923#1 [mm]
  rect 0.3x0.4 smd: 1(0,0) 2(-1,0)
  silkscreen extent -0.88,-0.4 -0.02,0.4
SOD923#2 [mm]
  rect 0.3x0.4 smd: A(0,0) K(-1,0)
  silkscreen extent -0.88,-0.4 -0.02,0.4
SOIC127P600X265-16N [mm] "SOIC, 16-Leads, Body 10.0x4.0mm (max), Pitch 1.27mm, IPC Medium Density"
  oval 2.2x0.6 smd: 1(-2.4,4.445) 2(-2.4,3.175) 3(-2.4,1.905) 4(-2.4,0.635) 5(-2.4,-0.635) 6(-2.4,-1.905) 7(-2.4,-3.175) 8(-2.4,-4.445) 9(2.4,-4.445) 10(2.4,-3.175) 11(2.4,-1.905) 12(2.4,-0.635) 13(2.4,0.635) 14(2.4,1.905) 15(2.4,3.175) 16(2.4,4.445)
  silkscreen extent -2.52,-5 0.9,5.42, body extent -2,-5 2,5, height 2.65
SOIC127P790X216-8N [mm] "SOIC, 8-Leads, Body 5.5x5.5mm (max), Pitch 1.27mm, IPC Medium Density"
  oval 2.5x0.6 smd: 1(-3.121,1.88) 2(-3.121,0.61) 3(-3.121,-0.66) 4(-3.121,-1.93) 5(3.35,-1.905) 6(3.35,-0.635) 7(3.35,0.635) 8(3.35,1.905)
  silkscreen extent -3.25,-2.75 1.88,2.85, body extent -2.75,-2.75 2.74,2.75, height 2.16
SOP65P640X265-20N [mm] "SOP, 20-Leads, Body 6.6x4.5mm (max), Pitch 0.65mm, IPC Medium Density"
  oval 1.7x0.35 smd: 1(-2.85,2.925) 2(-2.85,2.275) 3(-2.85,1.625) 4(-2.85,0.975) 5(-2.85,0.325) 6(-2.85,-0.325) 7(-2.85,-0.975) 8(-2.85,-1.625) 9(-2.85,-2.275) 10(-2.85,-2.925) 11(2.85,-2.925) 12(2.85,-2.275) 13(2.85,-1.625) 14(2.85,-0.975) 15(2.85,-0.325) 16(2.85,0.325) 17(2.85,0.975) 18(2.85,1.625) 19(2.85,2.275) 20(2.85,2.925)
  silkscreen extent -2.97,-3.3 1.6,3.77, body extent -2.25,-3.3 2.25,3.3, height 2.65
SOP127P600X168_HS-8N [mm] "SOP, 8-Leads, Body 5.0x4.0mm (max), Pitch 1.27mm, IPC Medium Density"
  oval 1.75x0.6 smd: 1(-2.6,1.905) 2(-2.6,0.635) 3(-2.6,-0.635) 4(-2.6,-1.905) 5(2.6,-1.905) 6(2.6,-0.635) 7(2.6,0.635) 8(2.6,1.905)
  rect 1.9x3 smd: 9(0,0)
  silkscreen extent -2.72,-2.5 1.33,2.88, body extent -2,-2.5 2,2.5, height 1.68
SOT23-3 [mm]
  rect 1x0.6 smd: 1(0,0) 2(0,2) 3(-2.5,1)
  silkscreen extent -2.1,-0.5 -0.5,2.5
SOT23-5(DBV) [mm]
  rect 0.9x0.5 smd: 1(0,0)
  oval 0.9x0.5 smd: 2(0,-0.95) 3(0,-1.9) 4(3,-1.9) 5(3,0)
  silkscreen extent 0.6,-2.5 2.4,0.6
SOT563-6 [mil] "SOT563-6"
  rect 12x18 smd: 1(-19.69,-26.57) 2(0,-26.57) 3(20,-26.57) 4(20,27) 5(0,27) 6(-19.69,27)
  silkscreen extent -31,-24 32,24
SRP5030T [mm]
  rect 2x1.8 smd: 1(0,-0.025) 2(4.5,0)
  silkscreen extent -0.4,-2.6 4.9,2.6
"TP_High PWR" [mm]
  rect 0.5x2 smd: 1(0,0) 2(0.75,0)
  silkscreen extent -0.5,-1 1.25,1
TPD [mm]
  round 1 smd: 1(0,0)
tpd [mm]
  round 1 smd: 1(0,0)
TSOT-23 [mm]
  rect 1.22x0.62 smd: 1(-0.007,-0.012) 2(-0.007,-0.962) 3(-0.007,-1.912) 4(2.613,-1.912) 5(2.613,-0.962) 6(2.613,-0.012)
  silkscreen extent -1.02,-2.55 3.55,0.81
USB-MICRO-5P-2 [mm]
  round 0.5 hole 0.5 unplated: 0(-0.7,0) 0(3.3,0)
  rect 0.4x1.5 smd: 1(2.6,0) 2(1.95,0) 3(1.3,0) 4(0.65,0) 5(0,0)
  rect 1.35x1.85 hole 1: 6(4.125,2.65) 7(-1.525,2.65)
  silkscreen extent -2.7,-0.7 5.3,5.1

## Part data
3.8V: library part TEST_P, "TEST_P"
4G 433MHz "GPS B": "MCU"
4G 433 ACPR BACK CHG GPS IRQ PWR: "Typical INFRARED GaAs LED"
Adapter VBAT: "Header, 2-Pin"
C1 C62 C64 C65 C66 C67 C68 C75 C79 C80 C81 C82 C84 C86 C87 C88 C90 C91 C105 C106 C107 C160 C161 C162: library part C, "C"
C2 C34 C39 C40 C41 C61 C69 C76 C77 C78 C93: library part "Cap Pol1", "Polarized Capacitor (Radial)"
C10 C26 C27 C28 C29 C32 C33 C35 C36 C38 C42 C47 C48 C49 C50 C51 C52 C53 C54 C55 C56 C57 C58 C59 C60: library part Cap, "Capacitor"
C22 C25 C30 C31: library part "Cap Pol2", "Polarized Capacitor (Axial)"
C23 C24 C92 C94: library part "Cap Semi", "Capacitor (Semiconductor SIM Model)"
C37 C70 C89: library part CAP, "Capacitor"
C43 C44 C45: library part C
C46 C95 C96 C97 C98 C99 C100 C101 C102 C103 C104: library part Cap, "Capacitor SMD"
D1: library part Diode, "Default Diode"
D2 D6 D7 D12: library part "D Zener", "Zener Diode"
D3 D9 D11: library part "DIODE S", "Schottky Diode"
D13 D14 D15: library part ESD9M5.0S-DTVS105
F2: library part "Fuse 1", "Fuse"
FB1: library part L_4, "L"
FB5: library part FB
"GPS A": library part SMA, "SMA Straight Connector"
L5 L6 L12 L13 L14 L15 L16: library part Inductor, "Inductor SMD"
L8 L10 L11 L17: library part Inductor, "Inductor"
L9: library part INDUCTOR
P1 P3: "Header, 4-Pin"
P2: "Header, 10-Pin"
Q1: library part FDS4935
Q2 Q4 Q6 Q8: library part BUK92150-55A, "BUK92150-55A"
Q3: library part BSC070N1ONS3
Q5 Q7: library part MOSFET-P, "ZXM61P03F"
R1 R2 R3 R4 R5 R6 R7 R8 R9 R10 R11 R12 R13 R14 R15 R16 R17 R18 R19 R20 R21 R22 R23 R24 R25 R27 R28 R30 R31 R32 R33 R34 R35 R36 R37 R38 R39 R41 R52 R68 R70 R71 R72 R73 R74 R75 R78 R79: library part Res2, "Resistor"
R26 R40 R53 R151: library part Res1, "Resistor"
R42 R44 R48 R49 R50 R51 R54 R55 R56 R57 R58 R59 R60 R61 R62 R63 R64 R65 R66 R69 R118: library part R, "R"
R67: library part RES2
S1: "Switch"
U11: library part XC6204
U12: library part M25P16-VMN6TPBA
U13: library part STM32F407VGT6
U19: library part "PE4259 RF Switch", "PE4259 Peregrine RF Switch"
U20: library part Si4463
U30: library part LTC4412
USB: "Header, 5-Pin"
Y3 Y4: library part XTAL3

## Free pads (board coordinates)
  round 137.8 hole 86.61: 0(27.74,2024.57) 1(3767.9,2024.57) 2(3767.9,-140.78) 3(27.74,-140.78)

## Via types
v1: diameter 20, hole 12, Top Layer to Bottom Layer, tented both sides, 317 vias
v2: diameter 30, hole 20, Top Layer to Bottom Layer, tented both sides, 93 vias
v3: diameter 40, hole 30, Top Layer to Bottom Layer, tented both sides, 20 vias
v4: diameter 35, hole 25, Top Layer to Bottom Layer, tented both sides, 15 vias
v5: diameter 35, hole 20, Top Layer to Bottom Layer, tented both sides, 13 vias
v6: diameter 25.98, hole 12.99, Top Layer to Bottom Layer, tented top, 8 vias
v7: diameter 30, hole 20, Top Layer to Bottom Layer, 1 vias
v8: diameter 59.06, hole 39.37, Top Layer to Bottom Layer, 1 vias

## Nets (pads, with @x,y where several pads share a name; then routed paths per layer and width w, separated by ;. In a path a pad name is that pad's centre, name@x,y a point inside that pad or via, vN(x,y) a via of type N, cw(c..) or ccw(c..) an arc to the next point about the centre after c; other vN are vias at no path point)
BATTERY_SUP: R13.2 R27.1 U13.17 | length 1426
  Top Layer w10: v1(767,363) 825.82,363 877.82,415 998,415 1054,471 v1@1054,802 ; 1253.26,985.26 U13.17@1329.26,985.26
  Bottom Layer w10: R13.2@700,79 702,81 R27.1@767,81 v1(767,363) ; v1(1055,802) 1115,802 1126.5,813.5 1126.5,941.5 1162,977 v1(1245,977)
CHRG: U13.39
COM0_RX: P2.2 R15.1 | length 611.1
  Top Layer w10: P2.2@189,280 279,280 325,234 386.1,234.33 707.67,234.33 727,215 v1(727,202)
  Bottom Layer w10: v1(727,202) R15.1@727,235
COM0_TX: P2.1 R14.1 | length 148.2
  Bottom Layer w10: P2.1@178,180 178,155 205,128 R14.1@290,128
DQ: D5.2 P2.5 R34.1 R52.2 | length 1679.7
  Top Layer w10: P2.5@189,580 189,574 303,460 462,460 488,434 488,350 533,305 843,305 913,375 1018,375 1095,452 1095,541 1113.94,559.94 R52.2@1404,559.94 ; D5.2@346.63,423 346.63,458.37
  Bottom Layer w10: P2.5@189,580 218,551 R34.1@282,551
FLASH_NCS1: R40.1 U12.1 U13.29 | length 551.9
  Top Layer w10: 1461.15,399.85 1461.15,430 ; U13.29@1461.15,754.95 1461.15,430 ; v1(1506,377.32) 1477.68,377.32 1461.15,393.85 1461.15,430
  Bottom Layer w10: R40.1@1467,375.32 1469,377.32 v1(1506,377.32) U12.1@1575.11,377.32
FLASH_NW: R53.2 U12.3 | length 114.5
  Bottom Layer w10: R53.2@1468,495.26 1502.74,495.26 1520.68,477.32 U12.3@1575.11,477.32
FLASH_SCLK: FLASH_SCLK.1 U12.6 U13.30 | length 597.6
  Top Layer w10: U13.30@1480.84,754.95 1480.84,527.16 1531,477 v1@1746.68,477
  Bottom Layer w10: v1(1746.68,476.32) U12.6@1829.89,476.32
FLASH_SDI: R151.1 U12.5 U13.32 | length 767.5
  Top Layer w10: U13.32@1520.2,754.95 1520.2,633.8 1568,586 1737,586 1760,563 v1(1760,526)
  Bottom Layer w10: v1(1760,526) 1760.32,526.32 U12.5@1829.89,526.32 2004.68,526.32 2025,506 R151.1@2025,439.32
FLASH_SDO: FLASH_SDO.1 U12.2 U13.31 | length 539.4
  Top Layer w10: U13.31@1500.52,754.95 1500.52,590.48 FLASH_SDO.1@1525.07,565.93 1554,537 v1(1666,537)
  Bottom Layer w10: U12.2@1575.11,427.32 1643.32,427.32 1666,450 v1(1666,537)
GAS_SENSE: D14.2 R1.1 R7.2 U13.18 | length 1465.6
  Top Layer w10: v1(326,1123) 326,1095 371.37,1049.63 D14.2@371.37,1042 ; v1(1240.08,940.08) 1265.58,965.57 U13.18@1329.26,965.57
  Top Layer w15: D14.2@371.37,1042 400.06,1013.32 R7.2@400.06,930
  POWER w15: v1@325.5,1123.5 370,1168 890,1168 900,1158 901,1157 901,961 921.92,940.08 v1(1240.08,940.08)
GND: 4G.2@3772.87,865.28 4G.3 433MHz.2 433MHz.3 "GPS A.2" "GPS B.2" "GPS B.3" Adapter.2 C1.2 C2.2 C10.1 C22.2 C23.1 C24.1 C25.2 C26.2 C27.2 C28.2 C29.2 C30.2 C31.2 C32.2 C33.2 C34.2 C38.2 C39.2 C40.2 C41.2 C42.2 C43.1 C44.1 C45.1 C46.1 C47.2 C48.2 C49.1 C50.1 C51.1 C52.1 C53.1 C54.1 C55.1 C56.1 C57.2 C58.1 C59.1 C60.1 C61.2 C62.1 C66.2 C67.2 C68.1 C69.2 C70.2 C75.2 C76.2 C77.2 C78.2 C79.2 C86.2 C89.2 C90.1 C91.1 C92.1 C93.2 C94.1 C95.2 C97.1 C98.2 C99.2 C104.1 C105.1 C107.1 C160.1 C161.1 C162.1 D1.1 D2.A D3.1 D4.1 D5.1 D6.A D7.A D9.1 D10.1 D12.A D13.1 D14.1 D15.1 P1.4 P2.3 P2.6 P2.9 P3.4 Q2.2 Q3.4 Q8.2 R3.1 R7.1 R12.1 R13.1 R30.2 R31.2 R33.2 R44.1 R48.2 R53.1 R56.2 R57.2 R58.1 R64.2 R65.2 R66.1 R68.2 R75.1 R151.2 SIM1.0 SIM1.5 SIM1.6 U1.15 U2.2 U3.2 U4.7 U4.9 U5.1 U5.2 U5.5 U5.10 U5.14 U5.37 U5.40 U5.41 U5.43 U5.57 U5.58 U5.60 U5.61 U5.64 U5.65 U5.77 U5.78 U5.80 U5.81 U9.1 U9.2 U10.2 U10.3 U10.5 U11.2 U12.4 U13.10 U13.20 U13.27 U13.74 U13.99 U16.6 U16.17 U17.6 U17.17 U19.2 U20.5 U20.18 U20.21 U21.5 U22.15 U30.2 U30.3 USB.4 USB.5 VBAT.1 Y3.2 Y3.4 Y4.2 Y4.4 | length 2753
  Top Layer w10: v1(1272,901) 1272,916 1282.2,926.2 U13.20@1329.26,926.2 ; v1(1403,842) 1403,818.36 1421.78,799.58 U13.27@1421.78,754.95 ; U13.99@1421.78,1373.05 1421.78,1457.17 ; 1837,1280.53 U13.74@1947.37,1280.53 ; v1(3353,1971) 3364,1982 U9.1@3394.32,1982 U9.2@3414,1982 ; v1(3565.63,2032.63) U10.3@3565.63,2001.84 U10.2@3585.32,2001.84 U10.5@3585.32,1982.16
  Top Layer w12: R48.2@345.94,617 326,617 309,634 309,771 319,781 C86.2@345.94,781 ; R65.2@346,545 346,583 ; R48.2@346,617 346,583 ; v1(378,583) 346,583 ; U17.6@491.5,689.47 535.79,689.47 U17.17@565.32,719 ; C160.1@978.32,1116 1030,1116 1050,1096 1050,965 1064,951 C60.1@1113,951 1113,1021.82 Y3.4@1104.32,1030.5 ; v1(1077,879) C59.1@1112.32,879 ; Y3.2@1171.78,1117.81 1177.02,1123.05 U13.10@1329.26,1123.05 ; U3.2@2028.32,1719.57 v1(2028.32,1742.68) ; U22.15@2349.11,229.2 2349.11,293.11 2368,312 C91.1@2383.32,312 ; U20.18@2635.32,96.18 v7(2635.32,170) 2674.69,209.37 U20.5@2709.13,209.37 ; v1(3042,135) U19.2@3097.6,135
  Top Layer w20: v1(370,1083) 393.87,1059.13 U30.2@519.03,1059.13 U30.3@519.03,1021.73 ; v1(644,1251) 658,1237 D12.A@658,1189 ; R66.1@720,445 741,445 v1(753,433) ; U4.9@860,1629 U4.7@937.36,1629 ; R58.1@981.32,569 981.32,516.24 v6(991.94,505.62)
  Bottom Layer w10: U16.6@938.79,408.18 U16.17@938.79,452.47
  Bottom Layer w12: C27.2@2452.32,985.8 v1(2479.8,985.8) ; U2.2@2552.9,962 2576,962 2588,974 v1(2588,1018)
  Bottom Layer w20: P2.3@189,380 232,380 ; C67.2@287.94,404 256,404 232,380 ; C66.2@292.94,196 273,196 251,218 251,361 232,380
  other v1: 664,-197 751,-192 841,-185 926,-182 2941,-181 3252,-181 567,-180 3424,-179 2656,-169 2818,-166 2014,-161 3575,-158 155,-141 789,-141 864,-141 713,-139 956,-139 633,-136 3305,-130 1858,-121 572,-116 3376,-113 3465,-108 2821,-106 2970,-105 2679,-98 3569,-94 3208,-81 667,-73 3043,-70 2854,-67 3299,-62 1899,-59 2054,-54 3420,-51 3514,-48 159,-33 2683,27 3536,45 3318,51 3389,96 3588,96 1805,98 2094,99 3480,107 3029,112 2972,118 1925,124 3032,173 2835,174 2887,174 2936,174 2789,175 2982,175 3220,187 3373,196 1694,218 3310,227 3194,232 3142,236 2902,254 1881,266 2029,281 2109,297 1509,333 1406,358 3480,364 3585,368 2968,387 2880,414 3538,415 2235,438 2787,444 2157,480 3470,488 3046,510 2984,514 2404,559 2317,578 1880,584 2004,584 3804,704 2381,735 955,751 3500,758 1009,759 3617,765 1093,767 2014,770 2952,797 3684,865 1745,883 1459,888 3086,889 3621,904 1627,907 3769,931 1834,933 1491,969 2899,979 3037,981 3651,993 3731,1019 1738,1040 1437,1046 3653,1087 2968,1105 1016,1116 1706,1131 3799,1143 1830,1160 1240,1161 3672,1188 -6,1192 2634,1206 1707,1221 1020,1225 3750,1242 1221,1262 2759,1267 2929,1268 1745,1278 3754,1292 -10,1306 1018,1308 3065,1310 573,1317 1260,1321 656,1332 2814,1341 3632,1346 528,1348 708,1349 3266,1370 2702,1371 -12,1379 3014,1388 2853,1394 682,1396 543,1398 609,1398 1100,1411 3562,1411 1037,1413 3693,1423 1145,1425 3633,1432 3315,1440 2750,1462 1959,1465 2385,1470 2646,1475 3569,1483 0,1492 3699,1537 3306,1538 4,1585 3654,1593 1269,1597 2382,1647 1347,1655 -2,1676 3654,1692 1345,1747 1900,1754 -2,1781 1906,1823 1353,1830 1824,1845 1682,1849 1536,1851 2378,1883 2319,1897 3120,1910 2438,1918 2569,1919 2663,1923 2397,1948 2630,1954 817,1955 2705,1955 3114,1957 2331,1969 3646,1970 2474,1986 1723,1988 2381,1993 997,2021 1819,2026 3493,2026 788,2040 2521,2061 2463,2064 2366,2071
  other v2: 213,-179 1941,-165 210,-103 1969,-65 211,-10 0,0 101,5 2007,97 3431,126 3424,233 1953,297 3462,423 3411,515 3388,731 2768,742 3074,769 3333,839 2906,849 1794,893 1534,909 3254,923 3003,943 3333,956 1423,1007 2148,1019 1805,1053 3018,1192 2718,1194 3275,1272 2379,1292 2622,1321 2412,1361 2945,1378 3070,1390 2779,1406 2641,1419 2493,1450 3544,1534 3544,1590.57 3544,1647.14 3544,1703.71 3544,1760.29 3544,1816.86 3544,1873.43 3544,1930 742,1962 899,1979 2591,2070 2655.78,2070 2720.56,2070 2785.33,2070 2850.11,2070 2914.89,2070 2979.67,2070 3044.44,2070 3109.22,2070 3174,2070
  other v6: 944.69,458.38 991.94,458.38 944.69,505.62 541.69,695.38 588.94,695.38 541.69,742.62 588.94,742.62
  other v8: 835,1604
LED_433MHZ: 433.2 U13.59 | length 2211.3
  Top Layer w10: U13.59@1947.37,985.26 2098.74,985.26 2179,905 2179,567 2229,517 v1(2916,517)
  POWER w10: v1(2916,517) 2916,608 2955,647 3064,647 433.2@3659.55,647
LED_BACK: BACK.2 U13.48 | length 2553.1
  Top Layer w10: U13.48@1835.16,754.95 1835.16,715 1835.48,714.68 1835.48,46.52 v1(1850,32)
  POWER w10: v1(1850,32) 1885,-3 BACK.2@3659.55,-3
LED_GPS: GPS.2 U13.58 | length 2234.7
  Top Layer w10: U13.58@1947.37,965.57 2090.42,965.57 2162,894 2162,556 2219,499 2897,499 v1(2915,481)
  POWER w10: v1(2915,481) 3014,481 3038.5,456.5 3038.5,357.5 3074,322 GPS.2@3659.55,322
LED_PWR: PWR.2 U13.57 | length 2353.7
  Top Layer w10: U13.57@1947.37,945.89 2084.11,945.89 2146,884 2146,548 2212,482 2880,482 v1(2913,449)
  POWER w10: v1(2913,449) 2991,449 3019,421 3019,218 3077.5,159.5 PWR.2@3659.55,159.5
LTE_GPS_ANTENA: C36.2 U5.79 | length 875.7
  Top Layer w20: U5.79@2522.69,1821.98 2522.69,1906 cw(c2622.69,1906) 2622.69,2006 C36.2@3257.26,2006
LTE_PWR: C42.1 D4.2 Q8.3 U5.3 | length 231
  Top Layer w10: v1(2104.74,1504.26) 2104.74,1537.63 2135.37,1537.63 2150.24,1522.76 U5.3@2262.84,1522.76
  Bottom Layer w10: v1(2104.74,1504.26) C42.1@2104.74,1537.63
LTE_PWR_EN: R54.2 U13.16 U16.11 | length 833
  Top Layer w10: v1(1243.05,1004.95) U13.16@1329.26,1004.95
  Bottom Layer w10: R54.2@907.91,819.86 907.91,620.09 938.79,589.21 U16.11@938.79,555.82 ; R54.2@916.06,828 1082,828 1111,857 1111,976 1139.95,1004.95 v1(1243.05,1004.95)
LTE_RST: C38.1 D10.2 Q2.3 U5.4 | length 268.7
  Top Layer w20: Q2.3@2106.74,1401.63 2107.48,1402.37 2170,1402.37 v1(2170,1452) 2201.39,1483.39 U5.4@2262.84,1483.39
  Bottom Layer w20: C38.1@2170,1402.37 v1(2170,1452)
LTE_RXD: Q4.2 R41.1 U5.68 | length 211.4
  Top Layer w20: v1(2955.69,1755.69) 2955.69,1821.91 U5.68@2955.76,1821.98
  Bottom Layer w20: Q4.2@2915.26,1884 2915.26,1862.33 2955.69,1821.91 v1(2955.69,1755.69)
LTE_TXD: Q6.2 U5.71 | length 232.7
  Top Layer w20: v1(2837.65,1756.35) U5.71@2837.65,1821.98
  Bottom Layer w20: v1(2837.65,1756.35) Q6.2@2837.65,1923.41
MCU_433_SWCLK: R8.1 U22.20 | length 148.7
  Top Layer w15: v1(2147.8,229.2) U22.20@2221.16,229.2
  Bottom Layer w15: R8.1@2147.32,154.06 2147.8,154.54 v1(2147.8,229.2)
MCU_433_SWDIO: R11.1 U22.19 | length 211.8
  Top Layer w15: U22.19@2246.75,229.2 v1@2246.75,290.25
  Bottom Layer w15: R11.1@2212.65,154.06 2212.65,214.35 2246,247.7 v1(2246,291)
MOTO_SENSE: D15.2 R5.1 R12.2 U13.33 | length 326.7
  Top Layer w10: U13.33@1539.89,754.95 v1(1539.89,837.11)
  Bottom Layer w10: R5.1@1501.31,782 1531,782 ; D15.2@1531,660 1531,782 ; v1(1539.89,837.11) 1560.32,816.68 R12.2@1560.32,782 1531,782
Net1.8V_1: 1.8V.1 C44.2 C45.2 U11.5 | length 177.8
  Bottom Layer w20: C45.2@3160,1924.37 3161.63,1926 C44.2@3218.37,1926 ; 1.8V.1@3218.32,1981 3218.32,1926.06 C44.2@3218.37,1926 ; C44.2@3220.32,1924.06 C44.2@3218.37,1926 ; U11.5@3279.31,1926 C44.2@3218.37,1926
Net3.3V_1: 3.3V.1 C39.1 C84.1 C86.1 R61.2 U17.1 U17.2 | length 716.4
  Top Layer w10: C86.1@394.9,787.9 U17.1@491.5,787.9 U17.2@491.5,768.21 ; C86.1@405,781 C84.1@405,845 ; R61.2@786,628 v1(822,628)
  Bottom Layer w10: v2(490,824) 771,824 822,773 v1@822,626
  other v2: 517,871 511,919 438,920
Net3.8V_1: 3.8V.1 C76.1 C77.1 C78.1 C79.1 C80.1 R49.2 U16.1 U16.2 | length 266.3
  Bottom Layer w10: C79.1@1132.32,241.06 C80.1@1203.32,241.06 1207.26,245 R49.2@1207.26,298 1207.26,328.74 1181.32,354.68 C76.1@1181.32,424
  other v3: 1103,411 1181,496 1178,649
Net4G_1: 4G.1@3749.32,484.5 R35.2 | length 77.6
  Bottom Layer w20: R35.2@3749.06,562 3749.06,484.76 4G.1@3749.32,484.5
Net4G_1: 4G.1@3702,814.1 D6.K U5.82 | length 250.2
  Top Layer w30: U5.82@3451.82,814.1 4G.1@3702,814.1
Net433_1: 433.1 R38.2 | length 79.1
  Bottom Layer w20: R38.2@3749.06,726 3749.06,647.26 433.1@3749.32,647
Net433MHz_1: 433MHz.1 C97.2 L14.1 | length 144.5
  Top Layer w25: 433MHz.1@3127.84,-90.84 L14.1@3127.84,53.63
NetACPR_1: ACPR.1 R74.2 | length 64.4
  Top Layer w10: v1(1028.65,-144.65) ACPR.1@1028.65,-112.45
  Bottom Layer w10: v1(1028.65,-144.65) R74.2@1028.65,-112.45